# EAGLE board x9d_usb-c_mod (EAGLE 9.4.2)
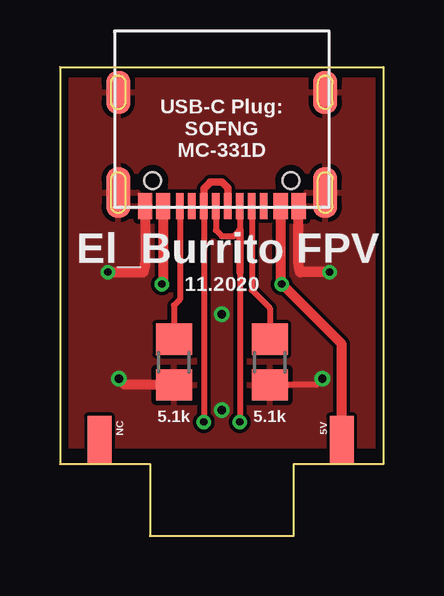
[diagram p0: board, top side]
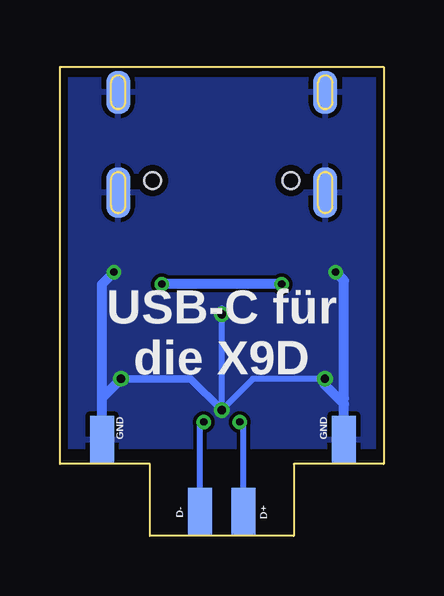
[diagram p1: board, bottom side, seen from below]

Size 13.5 x 19.55 mm. Coordinates in mm from the lower left corner, seen from the top.
Outline: 0,3 3.75,3 3.75,0 9.75,0 9.75,3 13.5,3 13.5,19.55 0,19.55 0,3
Copper layers (1*16): Top 0.035mm / dielectric 1.5mm / Bottom 0.035mm
Design rules "PCB-POOL Standard *": minimum track width 0.15mm, minimum drill 0.3mm, track to track 0.15mm, track to pad 0.15mm, pad to pad 0.15mm, via to via 0.15mm, smd to smd 0.15mm, copper to edge 0.3mm, drill to drill 0.2mm, minimum pad ring 0.2mm, minimum via ring 0.15mm, stop-mask expansion 0.03mm, vias tented up to drill 0.4mm, thermal gap 0.2mm

## Footprints (pad centres in the part's own frame; a part is rotated, then mirrored left to right if it is on the bottom)
PAD_1X2 = smd 1 x 2: P$1 0,0
R0805 = smd 1.3 x 1.5: 1 -0.95,0; 2 0.95,0
USB-C_MC-331D = smd 0.3 x 1.1: A5 -1.25,4.745; A6 -0.25,4.745; A7 0.25,4.745; A8 1.25,4.745; B5 1.75,4.745; B6 0.75,4.745; B7 -0.75,4.745; B8 -1.75,4.745 | smd 1 x 1.8: GND1 -4.32,0; GND2 4.32,0 | smd 1 x 2.1: GND3 -4.32,4.18; GND6 4.32,4.18 | smd 1 x 2.1 bottom: GND4 4.32,4.18; GND5 -4.32,4.18 | smd 1 x 1.8 bottom: GND7 4.32,0; GND8 -4.32,0 | smd 0.6 x 1.1: GND_A1/B12 -3.2,4.745; GND_B1/A12 3.2,4.745; VBUS_A4/B9 -2.45,4.745; VBUS_B4/A9 2.45,4.745 | hole 0.7: -2.89,3.68; 2.89,3.68

## Placement (x,y rotation side)
GND1  MOTORPADPAD_1X2  [PAD_1X2]  1.65,4 0 bottom
MID1  MOTORPADPAD_1X2  [PAD_1X2]  11.75,4 0 bottom
MID2  MOTORPADPAD_1X2  [PAD_1X2]  11.75,4 0 top
MID3  MOTORPADPAD_1X2  [PAD_1X2]  5.85,1 0 bottom
MID4  MOTORPADPAD_1X2  [PAD_1X2]  1.65,4 0 top
MID6  MOTORPADPAD_1X2  [PAD_1X2]  7.65,1 0 bottom
R1  5,1k  [R0805]  4.75,7.25 270 top
R2  5,1k  [R0805]  8.75,7.25 270 top
U$1  USB-C_2.0SOFNG_MC-331D  [USB-C_MC-331D]  6.75,18.5 180 top

## Library data of the parts
GND1 MID1-MID4 MID6 U$1 = JS_LIB2
R1 R2 = rcl; SPICEPREFIX: R

## Nets
GND: GND1.P$1 MID1.P$1 R1.2 R2.2 U$1.GND1 U$1.GND2 U$1.GND3 U$1.GND4 U$1.GND5 U$1.GND6 U$1.GND7 U$1.GND8 U$1.GND_A1/B12 U$1.GND_B1/A12
N$4: MID6.P$1 U$1.A7 U$1.B7
N$5: MID3.P$1 U$1.A6 U$1.B6
N$6: R1.1 U$1.B5
N$7: R2.1 U$1.A5
VCC: MID2.P$1 U$1.VBUS_A4/B9 U$1.VBUS_B4/A9

## Tracks (layer width: path | path; a pad name or v marks a point on that pad's centre or on a via)
GND  (via drill 0.3, 0.35)
  Top 0.254: v10.95,6.55 10.7,6.3 R2.2
  Top 0.406: U$1.GND_B1/A12 3.55,11.35 3.47,11 v2,11 | v11.25,11 10.03,11 9.95,11.35 U$1.GND_A1/B12 | R1.2 2.7,6.3 v2.45,6.55
  Bottom 0.254: v2.45,6.55 5.45,6.55 v6.75,5.25 v6.75,9.25 6.75,9.5
  Bottom 0.305: v6.75,5.25 8.05,6.55 v10.95,6.55
  Bottom 0.406: GND1.P$1 1.65,5.5 2.45,6.3 v2.45,6.55 | 1.65,5.75 1.65,10.65 v2,11 | MID1.P$1 11.75,5.75 | 11.75,5.75 11.75,10.5 v11.25,11 | v10.95,6.55 11.75,5.75
  pour Top: 0.25,19 13.25,19 13.25,3.75 0.25,3.75
  pour Bottom: 0.25,19 13.25,19 13.25,3.75 0.25,3.75
N$4  (via drill 0.3)
  Top 0.254: U$1.B7 7.5,12.75 7.25,12.5 6.75,12.5 6.5,12.75 U$1.A7 | 7.5,11 v7.5,4.75
  Top 0.305: 7.5,12.75 7.5,11
  Bottom 0.254: MID6.P$1 7.65,4.6 v7.5,4.75
N$5  (via drill 0.3)
  Top 0.254: U$1.B6 v6,4.75
  Top 0.305: 6.25,14.74 6.25,14.75 | U$1.B6 6,14.49 6.25,14.74 | 6.25,14.74 6.25,14.75 6.75,14.75 7,14.5 U$1.A6
  Bottom 0.254: MID3.P$1 5.85,4.6 v6,4.75
N$6
  Top 0.254: U$1.B5 5,9.87 4.75,9.62 R1.1
N$7
  Top 0.254: U$1.A5 8,10.25 8.75,9.5 R2.1
VCC  (via drill 0.3)
  Top 0.152: MID2.P$1 11.75,4.26
  Top 0.406: U$1.VBUS_A4/B9 9.2,10.62 9.25,10.57 v9.25,10.5 11.75,8 11.75,4.26 | v4.25,10.5 4.3,10.55 U$1.VBUS_B4/A9
  Bottom 0.406: v4.25,10.5 v9.25,10.5

## Text on the board
tNames: USB-C Plug: / SOFNG / MC-331D | El_Burrito FPV | 11.2020 | NC | 5.1k | 5.1k | 5V
bNames: USB-C für / die X9D | GND | GND | D+ | D-